# Altium PCB DSR_PCB_Altium.pcbdoc
Units mil, origin at the board's own origin, x right, y up, seen from the top; angles counter-clockwise.
Board outline 4240.23 x 3970 mil, 2 copper layers (Top Layer, Bottom Layer); 48 components, 77 nets, 203 pads, 37 vias.
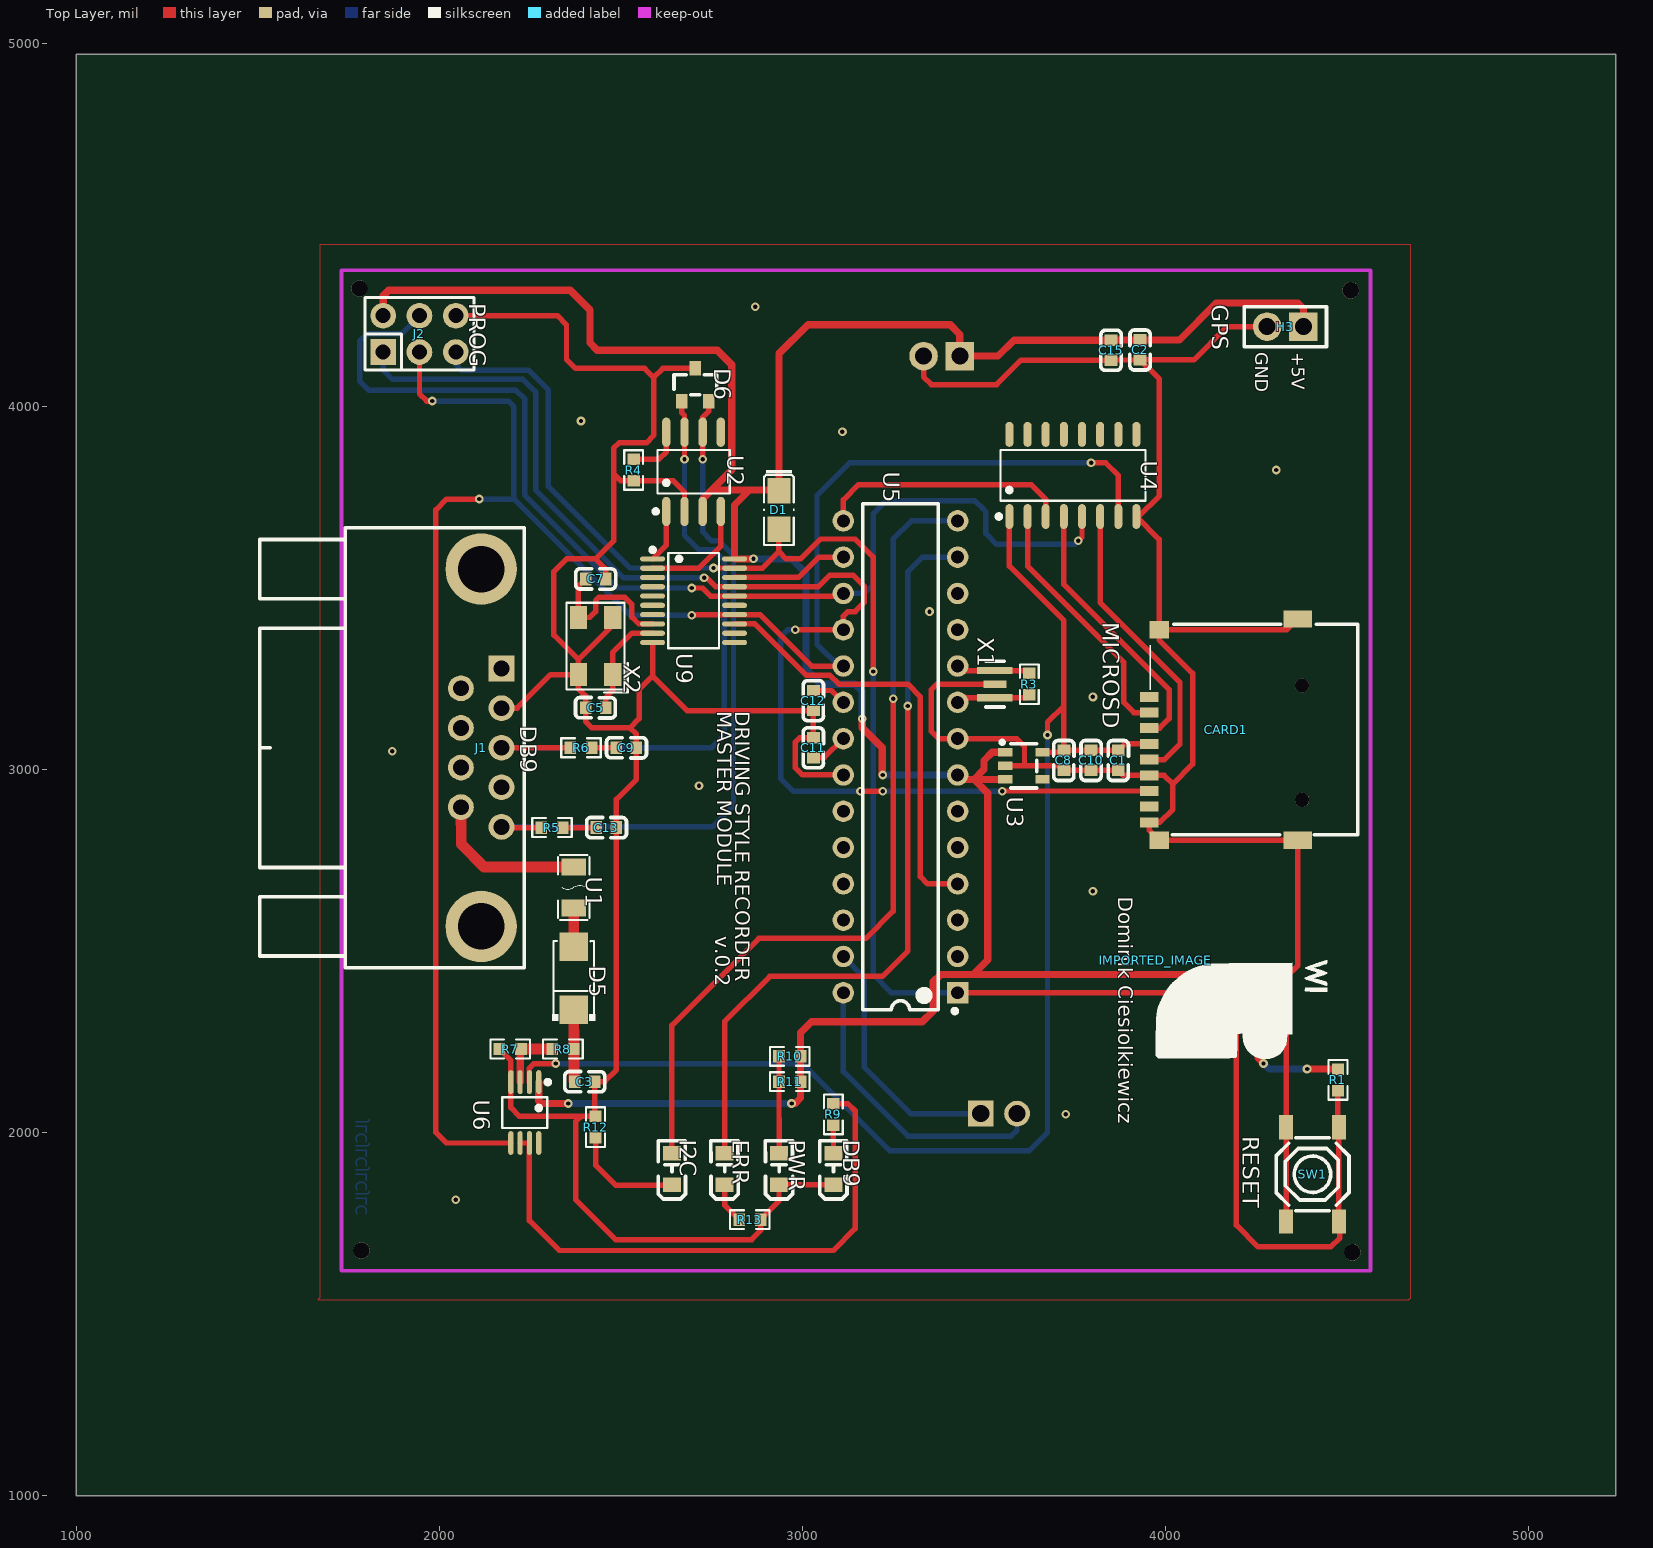
[diagram p0: Top Layer view]
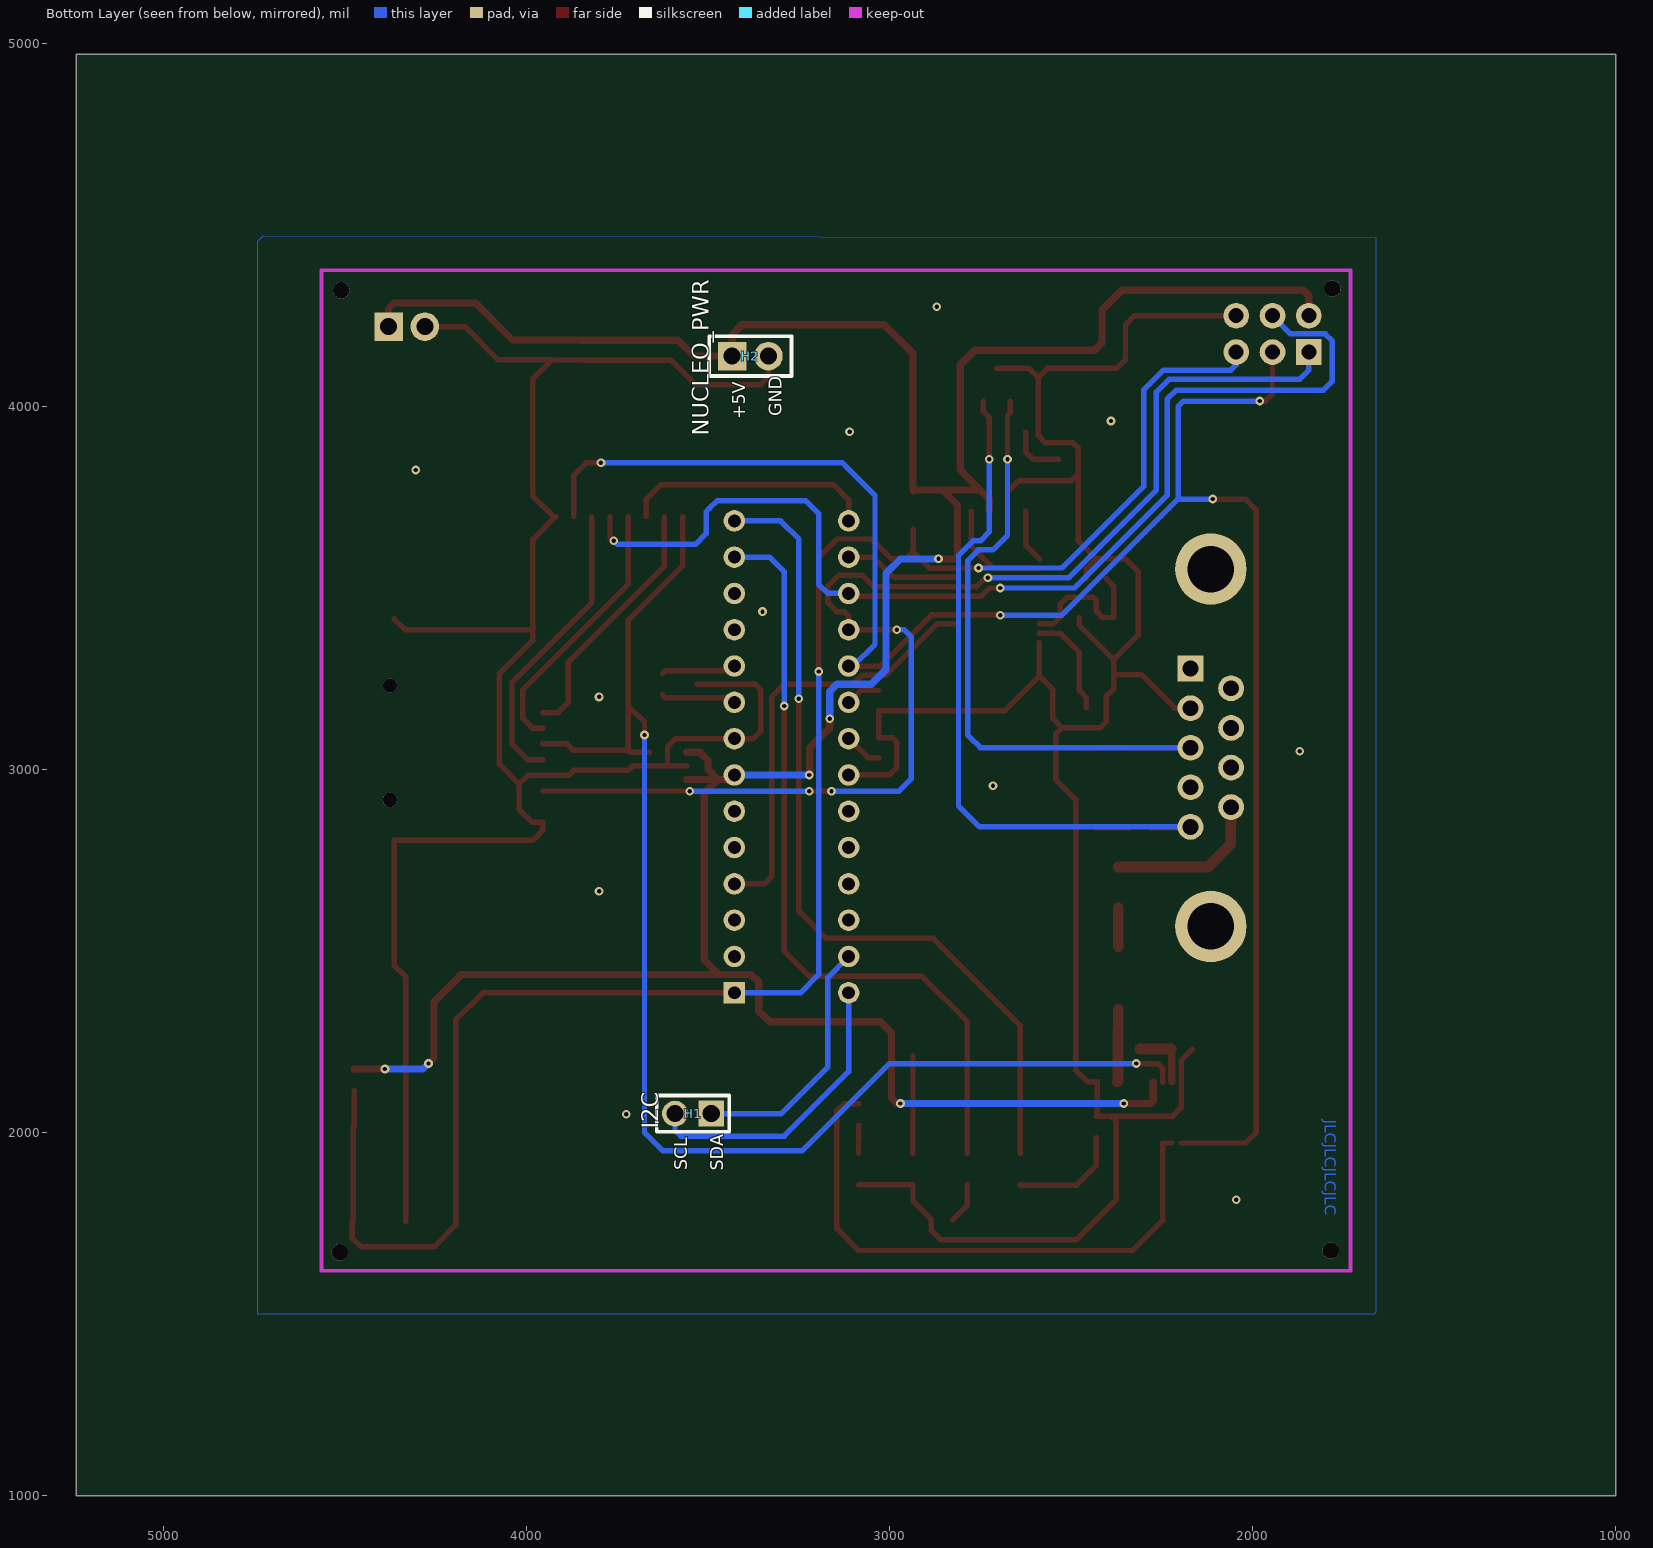
[diagram p1: Bottom Layer view, seen from below]

## Layer stack, top to bottom
Top Layer: signal copper (thickness not stored)
Dielectric: dielectric 12.6, FR-4, Dk 4.8
Bottom Layer: signal copper (thickness not stored)

## Board outline
5240.23,1000 1000,1000 1000,4970 5240.23,4970

## Components (designator, comment, footprint, x,y, rotation, side; value= is the part's Value field where it differs from the comment)
C1 "1uF" C0603 3870.24,3025 r90 top
C2 "100nF" C0603 3930.24,4155.8 r90 top
C3 "4.7uF" C0603 2400.24,2140 r180 top
C5 "22pF" C0603 2430.24,3170 r0 top
C7 "22pF" C0603 2430.24,3525 r180 top
C8 "100nF" C0603 3720.24,3025 r90 top
C9 "560pF" C0603 2515.24,3060 r180 top
C10 "1uF" C0603 3795.24,3025 r90 top
C11 "100nF" C0603 3030.24,3060 r90 top
C12 "100nF" C0603 3030.24,3190 r90 top
C13 "560pF" C0603 2460.24,2840 r180 top
C15 "100nF" C0603 3850.24,4155 r90 top
CARD1 "TF-01A" TF-SMD_TF-01A 4160.23,3110 r90 top
D1 "CD1206-S01575" D1206-RD 2935.24,3715 r270 top
D5 "MBRA140T3G" SMA_L4.3-W2.6-LS5.2-RD 2370.24,2425 r90 top
D6 "PESD1CAN,215" SOT-23_L2.9-W1.3-P1.90-LS2.4-BR 2705.24,4060 r270 top
DB9 "17-21SUYC/TR8" LED0805-RD 3085.63,1899.72 r90 top
ERR "0805G (Green)" LED0805-RD_GREEN 2785.63,1899.72 r90 top
H1 "210S-1*2P L=11.6MMGold-plated black" HDR-TH_2P-P2.54-V-M-1 3541.26,2052.16 r180 bottom
H2 "22850102ANG1SYA02" HDR-TH_2P-P2.54-V-F#1 3383.78,4138.78 r0 bottom
H3 "22850102ANG1SYA02" HDR-TH_2P-P2.54-V-F#2 4330.23,4220 r180 top
I2C "0805G (Green)" LED0805-RD_GREEN 2640.63,1899.72 r90 top
IMPORTED_IMAGE "IMPORTED_IMAGE" IMPORTED_IMAGE 3972.94,2475 r0 top
J1 "DS1037-09MNAKT74-0CC" DB9-TH_DT10121-M5N3-4F 2115.24,3060 r270 top
J2 "Header-Male-2.54_2x3" HDR-TH_6P-P2.54-V-M-R2-C3-S2.54-1 1945.23,4200 r0 top
PWR "0805G (Green)" LED0805-RD_GREEN 2935.63,1899.72 r90 top
R1 "10K" R0603 4475.23,2145 r90 top
R3 "1M" R0603 3625.24,3235 r270 top
R4 "4.7K" R0603 2535.24,3825 r270 top
R5 "100" R0603 2310.24,2840 r180 top
R6 "100" R0603 2390.24,3060 r180 top
R7 "10K" R0603 2195.24,2230 r0 top
R8 "10K" R0603 2340.24,2230 r0 top
R9 "1K" R0603 3085.24,2050 r90 top
R10 "1K" R0603 2965.24,2210 r0 top
R11 "1K" R0603 2965.24,2140 r0 top
R12 "1K" R0603 2430.24,2015 r90 top
R13 "1K" R0603 2855.24,1760 r0 top
SW1 "TS-1187A-B-A-B" SW-SMD_4P-L5.1-W5.1-P3.70-LS6.5-TL-2 4405.23,1885 r270 top
U1 "1206L035YR" F1206 2370.24,2675 r270 top
U2 "MCP2551-I/SN" SOIC-8_L4.9-W3.9-P1.27-LS6.0-BL 2700.24,3820 r0 top
U3 "LP2985-33DBVR" SOT-23-5_L2.9-W1.6-P0.95-LS2.8-TL 3610.24,3010 r180 top
U4 "74HC4050D,653" SOP-16_L10.0-W3.9-P1.27-LS6.0-BL 3745.24,3810 r0 top
U5 "ATMEGA328P-PU" DIP-28_L34.6-W7.3-P2.54-LS10.2-BL 3270.24,3035 r90 top
U6 "LMV358IDGKR" VSSOP-8_L3.0-W3.0-P0.65-LS5.0-BL 2235.24,2055 r180 top
U9 "MCP2515-I/ST" TSSOP-20_L6.5-W4.4-P0.65-LS6.4-BL 2700.24,3465 r270 top
X1 "16MHz" OSC-SMD_3P-L3.2-W1.3-P0.95-L 3530.24,3235 r270 top
X2 "16MHz" CRYSTAL-SMD_4P-L5.0-W3.2-BL 2430.24,3340 r90 top

## Footprints (in the part's own frame and the unit in brackets; to place one, negate y for a bottom-side part, rotate by r counter-clockwise, add the part's x,y. Pads: shape width x height; smd on the part's side, far side on the other; paste and mask are expansions set on the pad)
C0603 [mm]
  rect 0.8x0.9 smd: 1(-0.7,0) 2(0.7,0)
  silkscreen extent -1.41,-0.71 1.39,0.72
CRYSTAL-SMD_4P-L5.0-W3.2-BL [mm]
  rect 1.6x1.2 smd: 1(-2,-1.2) 2(2,-1.2) 3(2,1.2) 4(-2,1.2)
  silkscreen extent -3.26,-2.26 3.03,2.03
D1206-RD [mm]
  rect 1.785x1.62 smd: 1(-1.343,0) 2(1.342,0)
  silkscreen extent -2.77,-1.08 2.46,1.08
DB9-TH_DT10121-M5N3-4F [mm]
  rect 1.8x1.8 hole 1.1: 1(-5.54,1.42)
  round 1.8 hole 1.1: 2(-2.77,1.42) 3(0,1.42) 4(2.77,1.42) 5(5.54,1.42) 6(-4.155,-1.42) 7(-1.385,-1.42) 8(1.385,-1.42) 9(4.155,-1.42)
  round 5 hole 3.25: 10(-12.5,0) 11(12.5,0)
  silkscreen extent -15.4,-15.5 15.4,3
DIP-28_L34.6-W7.3-P2.54-LS10.2-BL [mm]
  rect 1.5x1.5 hole 0.9: 1(-16.51,-4)
  round 1.5 hole 0.9: 2(-13.97,-4) 3(-11.43,-4) 4(-8.89,-4) 5(-6.35,-4) 6(-3.81,-4) 7(-1.27,-4) 8(1.27,-4) 9(3.81,-4) 10(6.35,-4) 11(8.89,-4) 12(11.43,-4) 13(13.97,-4) 14(16.51,-4) 15(16.51,4) 16(13.97,4) 17(11.43,4) 18(8.89,4) 19(6.35,4) 20(3.81,4) 21(1.27,4) 22(-1.27,4) 23(-3.81,4) 24(-6.35,4) 25(-8.89,4) 26(-11.43,4) 27(-13.97,4) 28(-16.51,4)
  silkscreen extent -17.94,-3.95 17.7,2.65
F1206 [mil]
  rect 46.85x68.03 smd: 1(-56.89,0) 2(56.89,0)
  silkscreen extent -89,-43 89,43
HDR-TH_2P-P2.54-V-F#1 [mm]
  rect 2x2 hole 1.2: 1(1.27,0)
  round 2 hole 1.2: 2(-1.27,0)
  silkscreen extent -2.88,-1.4 2.88,1.39
HDR-TH_2P-P2.54-V-F#2 [mm]
  rect 2x2 hole 1.2: 1(-1.27,0)
  round 2 hole 1.2: 2(1.27,0)
  silkscreen extent -2.88,-1.39 2.88,1.4
HDR-TH_2P-P2.54-V-M-1 [mm]
  rect 1.8x1.8 hole 1.2: 1(1.27,0)
  round 1.8 hole 1.2: 2(-1.27,0)
  silkscreen extent -2.54,-1.27 2.54,1.27
HDR-TH_6P-P2.54-V-M-R2-C3-S2.54-1 [mm]
  rect 1.8x1.8 hole 1.05: 1(-2.54,-1.27)
  round 1.8 hole 1.05: 2(-2.54,1.27) 3(0,-1.27) 4(0,1.27) 5(2.54,-1.27) 6(2.54,1.27)
  silkscreen extent -3.81,-2.54 3.81,2.54
IMPORTED_IMAGE [mil]
  silkscreen extent 0,-272 473,0
LED0805-RD [mm]
  rect 1x1.25 smd: 1(-1.1,0) 2(1.1,0)
  silkscreen extent -2.1,-0.95 1.98,0.96
LED0805-RD_GREEN [mm]
  rect 1x1.25 smd: 1(-1.1,0) 2(1.1,0)
  silkscreen extent -2.1,-0.95 1.98,0.96
OSC-SMD_3P-L3.2-W1.3-P0.95-L [mm]
  rect 0.5x2.5 smd: 1(-0.95,0) 3(0.95,0)
  rect 0.5x1.6 smd: 2(0,0)
  silkscreen extent -1.6,-0.65 1.6,0.65
R0603 [mil]
  rect 31.75x34.02 smd: 1(-29.66,0) 2(29.66,0)
  silkscreen extent -55,-26 55,26
SMA_L4.3-W2.6-LS5.2-RD [mm]
  rect 2x2 smd: 1(-2.2,0) 2(2.2,0)
  silkscreen extent -2.98,-1.5 2.6,1.5
SOIC-8_L4.9-W3.9-P1.27-LS6.0-BL [mm]
  oval 0.588x2.045 smd: 1(-1.905,-2.773) 2(-0.635,-2.773) 3(0.635,-2.773) 4(1.905,-2.773) 5(1.905,2.773) 6(0.635,2.773) 7(-0.635,2.773) 8(-1.905,2.773)
  silkscreen extent -2.8,-2.92 2.53,1.52
SOP-16_L10.0-W3.9-P1.27-LS6.0-BL [mm]
  oval 0.56x1.745 smd: 1(-4.445,-2.873) 2(-3.175,-2.873) 3(-1.905,-2.873) 4(-0.635,-2.873) 5(0.635,-2.873) 6(1.905,-2.873) 7(3.175,-2.873) 8(4.445,-2.873) 9(4.445,2.873) 10(3.175,2.873) 11(1.905,2.873) 12(0.635,2.873) 13(-0.635,2.873) 14(-1.905,2.873) 15(-3.175,2.873) 16(-4.445,2.873)
  silkscreen extent -5.33,-3.02 5.08,1.77
SOT-23-5_L2.9-W1.6-P0.95-LS2.8-TL [mm]
  rect 1x0.6 smd: 1(1.3,-0.95) 2(1.3,0) 3(1.3,0.95) 4(-1.3,0.95) 5(-1.3,-0.95)
  silkscreen extent -0.9,-1.78 1.65,1.55
SOT-23_L2.9-W1.3-P1.90-LS2.4-BR [mm]
  rect 1x0.8 smd: 1(1.15,-0.95) 2(1.15,0.95) 3(-1.15,0)
  silkscreen extent -0.7,-1.5 0.7,1.5
SW-SMD_4P-L5.1-W5.1-P3.70-LS6.5-TL-2 [mm]
  rect 1.7x1 smd: 1(-3.3,1.849) 2(3.3,1.85) 3(-3.3,-1.85) 4(3.3,-1.85)
  silkscreen extent -2.55,-2.55 2.55,2.55
TF-SMD_TF-01A [mm]
  rect 0.7x1.3 smd: 1(2.292,5.2) 2(1.192,5.198) 3(0.096,5.2) 4(-1.004,5.2) 5(-2.103,5.2) 6(-3.201,5.2) 7(-4.297,5.2) 8(-5.395,5.2) 9(-6.499,5.2)
  rect 1.2x1.397 smd: 10(-7.747,4.502) 13(6.985,4.502)
  rect 1.2x2 smd: 11(-7.747,-5.2) 12(7.747,-5.2)
  round 1 hole 1 unplated: ""(-4.915,-5.49) ""(3.084,-5.487)
  silkscreen extent -7.37,-9.4 7.37,5.14
TSSOP-20_L6.5-W4.4-P0.65-LS6.4-BL [mm]
  oval 0.364x1.742 smd: 1(-2.925,-2.871) 2(-2.275,-2.871) 3(-1.625,-2.871) 4(-0.975,-2.871) 5(-0.325,-2.871) 6(0.325,-2.871) 7(0.975,-2.871) 8(1.625,-2.871) 9(2.275,-2.871) 10(2.925,-2.871) 11(2.925,2.871) 12(2.275,2.871) 13(1.625,2.871) 14(0.975,2.871) 15(0.325,2.871) 16(-0.325,2.871) 17(-0.975,2.871) 18(-1.625,2.871) 19(-2.275,2.871) 20(-2.925,2.871)
  silkscreen extent -3.71,-3.02 3.33,1.77
VSSOP-8_L3.0-W3.0-P0.65-LS5.0-BL [mm]
  oval 0.364x1.662 smd: 1(-0.975,-2.131) 2(-0.325,-2.131) 3(0.325,-2.131) 4(0.975,-2.131) 5(0.975,2.131) 6(0.325,2.131) 7(-0.325,2.131) 8(-0.975,2.131)
  silkscreen extent -1.76,-2.28 1.58,1.07

## Free pads (board coordinates)
  round 45.35 hole 45.35 unplated: 2(1780.23,4325) 2(1785.23,1675) 2(4510.23,4320) 2(4515.23,1670)

## Via types
v1: diameter 24, hole 12, Top Layer to Bottom Layer, 37 vias

## Nets (pads, with @x,y where several pads share a name; then routed paths per layer and width w, separated by ;. In a path a pad name is that pad's centre, name@x,y a point inside that pad or via, vN(x,y) a via of type N, cw(c..) or ccw(c..) an arc to the next point about the centre after c; other vN are vias at no path point)
+3.3V: C1.2 C8.2 C10.2 CARD1.4 U3.5 U4.1 U6.2 | length 3795.6
  Top Layer w15: U6.2 2248.03,2177.79 2260.24,2190 v1(2320.24,2190) ; U4.1 3570.24,3560 3720.24,3410 C8.2 ; U3.5 3715.07,3047.4 C8.2 ; v1(3675.24,3095) 3675.24,3130.53 3720.24,3175.53 ; CARD1.4 3888.16,3070.48 C1.2 C10.2 C8.2
  Bottom Layer w15: v1(2320.24,2190) 3000.24,2190 3240.24,1950 3625.24,1950 3675.24,2000 v1(3675.24,3095)
+5V: C2.2 C15.2 D1.1 H2.1 H3.1 J2.2 R1.2 R10.2 R11.2 U2.3 U3.1 U3.3 U5.7 U6.1 U9.20 | length 8743.8
  Top Layer w20: J2.2 1845.23,4305 1860.23,4320 2360.24,4320 2415.24,4265 2415.24,4175 2435.24,4155 2765.24,4155 2805.24,4115 2805.24,3825 2750.24,3770 ; U6.1 2273.62,2086.61 2280.24,2080 v1(2355.24,2080) ; U2.3 2725.24,3745 2750.24,3770 ; 2854.45,3770 2813.26,3728.82 U9.20 v1(2865.24,3580.16) ; D1.1 2933.09,3770 2750.24,3770 ; D1.1 2935.24,4145 3015.24,4225 3407.34,4225 3433.74,4198.5 H2.1@3433.74,4138.8 ; v1(2970.24,2080) 2980.24,2080 2994.93,2095.3 R11.2 ; R11.2 R10.2 2994.89,2274.66 3025.24,2305 3330.24,2305 3360.24,2335 3360.24,2415 3380.24,2435 3470.24,2435 ; v1(3165.24,3140) 3165.24,3115 3220.24,3060 3220.24,2990 v1@3220.24,2985 ; U5.7 3440.11,2972.6 U3.3@3559.05,2972.6 ; H2.1 3539.01,4138.78 3582.8,4182.56 C15.2 ; U3.1@3559.03,3047.4 3522.64,3047.4 3500.24,3025 3500.24,3000.4 3472.43,2972.6 3510.24,2934.8 3510.24,2475 3470.24,2435 ; C15.2 C2.2 ; C2.2 4038.59,4183.36 4140.23,4285 4365.23,4285 4380.23,4270 H3.1 ; v1(4270.23,2190) 4255.23,2205 4255.23,2360 4180.23,2435 3470.24,2435 ; v1(4390.23,2175) 4474.9,2175 R1.2 ; v1@3220.24,2985 v1(3221.24,2985) v1@3220.24,2985
  Bottom Layer w20: v1(2355.24,2080) v1(2970.24,2080) ; v1(2865.24,3580.16) 2970.07,3580.16 3010.24,3540 3010.24,3275 3050.24,3235 3145.24,3235 3165.24,3215 v1(3165.24,3140) ; v1(3221.24,2985) U5.7 ; v1(4270.23,2190) 4285.23,2175 v1(4390.23,2175)
+12V: C3.2 D5.1 R8.2 | length 199.3
  Top Layer w30: D5.1 R8.2@2370.53,2230 ; R8.2@2370.57,2230 2370.57,2142.1 C3.2
C11_1: C11.1 U5.21 | length 104.3
  Top Layer w15: C11.1 3060.2,3032.44 U5.21
C12_2: C12.2 U5.20 | length 96
  Top Layer w15: C12.2 3080.2,3217.56 U5.20
CAN_INT: U5.4 U9.13 | length 1201
  Top Layer w15: U9.13@2813.24,3401 2869.24,3401 3010.24,3260 3075.24,3260 3100.24,3235 3290.24,3235 3325.24,3200 3325.24,2705 3345.24,2685 U5.4
CAN_RXD: U2.4 U9.2 | length 308.9
  Top Layer w15: U9.2 2714.8,3554.57 2775.24,3615 U2.4
CAN_TXD: U2.1 U9.1 | length 146.4
  Top Layer w15: U9.1 2625.24,3618.19 U2.1
CARD1_1: CARD1.1
CARD1_2: CARD1.2 U4.2 | length 703.7
  Top Layer w15: U4.2 3620.24,3560 3885.24,3295 3885.24,3185 3913.3,3156.93 CARD1.2
CARD1_3: CARD1.3 U4.4 | length 742.6
  Top Layer w15: U4.4 3720.24,3510 4010.24,3220 4010.24,3140 3983.99,3113.76 CARD1.3
CARD1_5: CARD1.5 U4.6 | length 820.5
  Top Layer w15: U4.6 3820.24,3460 4040.24,3240 4040.24,3070 3997.43,3027.2 CARD1.5
CARD1_8: CARD1.8
D7: ERR.2 U5.13 | length 2146.6
  Top Layer w15: ERR.2 2785.62,2305.39 2910.24,2430 3220.24,2430 3290.24,2500 v1(3290.24,3175)
  Bottom Layer w15: v1(3290.24,3175) 3290.24,3545 3330.24,3585 U5.13
D8: I2C.2 U5.14 | length 2315.5
  Top Layer w15: I2C.2 2640.62,2295.39 2880.24,2535 3175.24,2535 3250.24,2610 3250.24,3170 v1(3250.24,3195)
  Bottom Layer w15: v1(3250.24,3195) 3250.24,3635 3300.24,3685 U5.14
D9: U4.3 U5.15 | length 697.3
  Top Layer w15: U5.15@3112.74,3685 3112.74,3742.5 3155.24,3785 3630.24,3785 3670.24,3745 U4.3
D10: U5.16 U9.18 | length 322.7
  Top Layer w15: U9.18 2989.22,3528.98 3045.24,3585 U5.16
D11/MOSI: J2.4 U4.5 U5.17 U9.16 | length 3067.4
  Top Layer w15: v1(2695.24,3500) 2725.24,3500 2747.45,3477.79 U9.16 3105.55,3477.79 U5.17 ; v1(3760.24,3630) 3770.24,3640 U4.5
  Bottom Layer w15: J2.4 1895.23,4200 1800.23,4200 1780.23,4180 1780.23,4070 1805.23,4045 2210.24,4045 2235.24,4020 2235.24,3755 2490.24,3500 v1(2695.24,3500) ; U5.17@3112.74,3485 3170.24,3485 3195.24,3510 3195.24,3705 3230.24,3740 3475.24,3740 3495.53,3719.7 3505.24,3710 3505.24,3650 3535.24,3620 3750.24,3620 v1(3760.24,3630)
D12/MISO: CARD1.7 J2.1 U5.18 U9.17 | length 3562
  Top Layer w15: v1(2729.24,3528) 2737.24,3528 2761.85,3503.39 U9.17 3043.64,3503.4 3075.24,3535 3140.24,3535 3170.24,3505 3170.24,3460 3145.24,3435 3125.24,3435 3112.76,3422.52 U5.18 v1(2980.24,3385) ; v1(3160.24,2940) v1(3221.24,2940) ; v1(3550.24,2940) CARD1.7
  Bottom Layer w15: J2.1 1845.23,4100 1870.23,4075 2230.24,4075 2265.24,4040 2265.24,3770 2507.24,3528 v1(2729.24,3528) ; v1(2980.24,3385) 2960.24,3385 2940.24,3365 2940.24,2975 2975.24,2940 v1(3160.24,2940) ; v1(3221.24,2940) v1(3550.24,2940)
GND: C1.1 C2.1 C3.1 C5.1 C7.1 C8.1 C9.1 C10.1 C11.2 C12.1 C13.1 C15.1 CARD1.6 CARD1.9 CARD1.10 CARD1.11 CARD1.12 CARD1.13 D6.3 DB9.1 H2.2 H3.2 J1.2 J2.6 pad.2 PWR.1 R4.2 R7.1 R12.2 R13.2 SW1.3 SW1.4 U2.2 U3.2 U4.8 U5.8 U5.22 U6.4 U9.10 X1.2 X2.2 X2.4 | length 12139.5
  Top Layer w15: J2.6 2325.24,4250 2350.24,4225 2350.24,4130 2375.24,4105 2565.24,4105 2590.24,4080 ; R7.1 2196.84,2198.73 U6.4 2196.84,2068.4 2220.53,2044.7 2389.93,2044.7 ; J1.2 2214.28,3169.05 2306.49,3261.26 X2.4 ; 2383.03,3302.8 2315.24,3370 2315.24,3545 2350.24,3580 2430.24,3580 ; R12.2 2427.8,2047.1 C3.1 2455.24,2140 2487.8,2172.56 C13.1 2487.8,2917.56 2542.8,2972.56 C9.1 2542.8,3097.44 2525.24,3115 ; R12.2 2389.93,2044.7 ; C7.1 2457.84,3552.4 2430.24,3580 ; X2.2 2477.47,3397.24 2382.99,3302.76 X2.4 ; U9.10 2587.2,3257.91 2682.67,3162.44 C12.1 C11.2 ; 2587.24,3257.9 2550.24,3220 2550.24,3140 2525.24,3115 ; U2.2 2675.24,3765 2644.89,3795.34 R4.2 2499.89,3795.34 2480.24,3815 ; D6.3 2615.51,4105.28 2590.24,4080 ; R13.2 2935.62,1810.73 PWR.1 DB9.1 ; R13.2 2884.93,1730.3 2860.24,1705 2485.24,1705 2375.24,1815 2375.24,2030 2389.93,2044.7 ; C11.2 2992.84,3087.6 2980.24,3075 2980.24,3005 3000.24,2985 U5.22@3112.74,2985 ; H2.2 3333.78,4081.46 3355.24,4060 3535.24,4060 3602.68,4127.44 C15.1 ; X1.2 3370.24,3235 3355.24,3220 3355.24,3105 3375.24,3085 U5.8 3590.24,3085 3611.76,3063.47 3611.76,3010 ; U3.2@3559.05,3010 3707.68,3010 C8.1 C10.1 C1.1 3883.7,2983.98 CARD1.6 3996.26,2983.98 4020.24,2960 ; C15.1 C2.1 ; H3.2 4170.23,4220 4078.47,4128.24 C2.1 3983.24,4075.24 3983.24,3754 3926.14,3696.91 U4.8 3983.01,3634.14 CARD1.13 ; SW1.4 SW1.3 4332.39,2427.75 4364.94,2460.3 4364.94,2805 CARD1.10 3955.51,2832.49 CARD1.9 3984.36,2854.12 4020.24,2890 4020.24,2960 ; CARD1.12 4334.96,3385 CARD1.13 ; X2.4 2382.99,3222.24 2402.68,3202.56 C5.1 2402.68,3132.56 2420.24,3115 2525.24,3115 ; 2430.24,3580 2480.24,3630 2480.24,3815 ; 2480.24,3815 2480.24,3885 2495.24,3900 2570.24,3900 2590.24,3920 2590.24,4080 ; CARD1.13 3983.01,3357.23 4075.24,3265 4075.24,3015 4020.24,2960
  other v1: 2045.23,1815 3725.24,2050 3800.24,2665 2715.24,2955 1870.23,3050 3800.24,3200 3350.24,3435 4305.23,3825 3110.24,3930 2390.24,3960 2870.24,4275
J1_1: J1.1
J1_4: J1.4
J1_6: J1.6
J1_7: J1.7
J1_8: J1.8
J1_9: J1.9 U1.1 | length 437.5
  Top Layer w30: J1.9 2060.24,2795 2123.34,2731.9 U1.1
J1_10: J1.10
J1_11: J1.11
R3_1: R3.1 U5.10 X1.1 | length 205.9
  Top Layer w15: U5.10 3440.32,3272.4 X1.1 3617.49,3272.4 R3.1
R3_2: R3.2 U5.9 X1.3 | length 205.9
  Top Layer w15: U5.9 3440.32,3197.6 X1.3 3617.49,3197.6 R3.2
R5_1: C13.2 R5.1 | length 92.8
  Top Layer w15: R5.1 C13.2
R6_1: C9.2 R6.1 | length 67.8
  Top Layer w15: R6.1 C9.2
R7_2: R7.2 R8.1 U6.3 | length 177.8
  Top Layer w20: U6.3 2222.43,2227.54 R7.2
  Top Layer w30: R7.2 R8.1
R9_1: DB9.2 R9.1 | length 77.3
  Top Layer w15: R9.1 DB9.2
R10_1: PWR.2 R10.1 R11.1 | length 267
  Top Layer w15: R11.1@2935.53,2140 PWR.2 ; R11.1 R10.1
R12_1: I2C.1 R12.1 | length 309.1
  Top Layer w15: R12.1 2430.24,1910 2485.24,1855 2639.21,1855 I2C.1
R13_1: ERR.1 R13.1 | length 113
  Top Layer w15: ERR.1 2785.62,1799.95 R13.1
RS: D1.2 J2.5 R1.1 SW1.1 SW1.2 U5.1 U9.19 | length 5199.2
  Top Layer w15: v1(2755.24,3555) U9.19@2813.24,3554.6 ; U9.19 2889.8,3554.57 2935.24,3600 ; D1.2@2935.24,3662.14 2935.24,3600 ; v1(3195.24,3270) 3195.24,3465 3195.24,3585 3190.24,3590 3145.24,3635 3125.24,3635 3050.24,3635 2995.24,3580 2955.24,3580 2935.24,3600 ; U5.1 4120.23,2385 4195.23,2310 4195.23,1745 4255.23,1685 4455.23,1685 4480.23,1710 4480.23,1752.93 SW1.2 ; R1.1 4475.23,2017.72 SW1.1 SW1.2@4478.03,1755.1
  Bottom Layer w15: J2.5 2045.23,4115 2060.24,4100 2245.24,4100 2300.24,4045 2300.24,3780 2525.24,3555 v1(2755.24,3555) ; v1(3195.24,3270) 3195.24,2435 3245.24,2385 U5.1
SCK: J2.3 U4.7 U5.19 U6.5 U9.14 | length 5407.1
  Top Layer w15: J2.3 1945.23,4035 1965.23,4015 v1(1980.23,4015) ; v1(2110.24,3745) 2020.23,3745 1990.23,3715 1990.23,2000 2019.13,1971.1 U6.5 ; v1(2695.24,3425) 2696.84,3426.61 U9.14 2883.62,3426.61 3025.24,3285 U5.19 ; v1(3795.24,3845) 3835.24,3845 3870.24,3810 U4.7
  Bottom Layer w15: v1(1980.23,4015) 2190.24,4015 2205.24,4000 2205.24,3745 ; v1(2110.24,3745) 2205.24,3745 ; v1(2695.24,3425) 2525.24,3425 2205.24,3745 ; U5.19 3100.24,3285 3040.24,3345 3040.24,3755 3120.24,3835 3130.24,3845 v1(3795.24,3845)
U1_2: D5.2 U1.2 | length 106.5
  Top Layer w30: D5.2 U1.2
U2_5: U2.5
U2_6: D6.2 J1.5 R5.2 U2.6 | length 1942.2
  Top Layer w15: J1.5 2173.03,2840 R5.2 ; v1(2725.24,3855) U2.6 2725.24,3970 2742.64,3987.4 D6.2
  Bottom Layer w15: J1.5 2752.12,2841.89 2810.24,2900 2810.24,3590 2770.24,3630 2750.24,3630 2725.24,3655 v1(2725.24,3855)
U2_7: D6.1 J1.3 R6.2 U2.7 | length 1809.8
  Top Layer w15: J1.3 R6.2 ; D6.1 2667.84,3982.4 2675.24,3975 U2.7 v1(2675.24,3855)
  Bottom Layer w15: J1.3 2750.24,3060 2780.24,3090 2785.24,3095 2785.24,3575 2755.24,3605 2715.24,3605 2675.24,3645 v1(2675.24,3855)
U2_8: R4.1 U2.8 | length 152.6
  Top Layer w15: R4.1 2604.89,3854.66 2625.24,3875 U2.8
U3_4: U3.4
U4_9: U4.9
U4_10: U4.10
U4_11: U4.11
U4_12: U4.12
U4_13: U4.13
U4_14: U4.14
U4_15: U4.15
U4_16: U4.16
U5_2: U5.2
U5_3: U5.3
U5_5: U5.5
U5_6: U5.6
U5_11: U5.11
U5_12: U5.12
U5_23: U5.23
U5_24: U5.24
U5_25: U5.25
U5_26: U5.26
U5_27: H1.1 U5.27 | length 702.8
  Bottom Layer w15: U5.27@3112.74,2485 3170.24,2427.5 3170.24,2180 3298.07,2052.17 H1.1
U5_28: H1.2 U5.28 | length 822.4
  Bottom Layer w15: U5.28@3112.74,2385 3112.74,2167.5 3290.24,1990 3575.24,1990 3591.24,2006 H1.2@3591.24,2052.2
U6_6: R9.2 U6.6 U6.7 | length 1588.6
  Top Layer w15: U6.6 U6.7 ; U6.7 2248.03,1757.2 2330.24,1675 3085.24,1675 3145.24,1735 3145.24,2060 3124.93,2079.7 R9.2
U6_8: U6.8
U9_3: U9.3
U9_4: U9.4
U9_5: U9.5
U9_6: U9.6
U9_7: U9.7
U9_8: C7.2 U9.8 X2.3 | length 410.6
  Top Layer w15: C7.2 2382.99,3505.32 X2.3 2413.97,3418.74 2430.24,3435 2430.24,3465 2440.24,3475 2510.24,3475 2530.24,3455 2530.24,3420 2549.22,3401.02 U9.8
U9_9: C5.2 U9.9 X2.1 | length 292.2
  Top Layer w15: C5.2 2457.8,3197.56 2477.47,3217.24 X2.1 2477.47,3322.24 2530.66,3375.43 U9.9
U9_11: U9.11
U9_12: U9.12
U9_15: U9.15
pads on no net: CARD1.

## Polygon pours and split planes (outlines as drawn)
GND on Bottom Layer (solid): 1660.23,4465 1660.23,1505 1665.23,1500 4740.23,1500 4740.23,4455 4725.23,4470
GND on Top Layer (solid): 1670.23,4445 1670.23,1545 1665.23,1540 4670.23,1540 4675.23,1545 4675.23,4445

## Other copper
Bottom Layer:
  text "JLCJLCJLCJLC" at 1800.98,2035 h31.5 r90

## Silkscreen, mask and mechanical layers (free items; w line width, h text height)
Top Overlay:
  text "PROG" at 2082.74,4285 h45 r270
  text "GPS" at 4127.73,4280 h45 r270
  text "GND" at 4247.73,4150 h35 r270
  text "+5V" at 4347.73,4150 h35 r270
  text "MICROSD" at 3827.74,3405 h45 r270
  text "MASTER MODULE" at 2765.24,3160 h40 r270
  text "DRIVING STYLE RECORDER" at 2815.24,3160 h40 r270
  text "DB9" at 2222.74,3120 h45 r270
  text "Dominik Ciesiolkiewicz" at 3870.24,2650 h40 r270
  text "v.0.2" at 2760.24,2540 h40 r270
  text "RESET" at 4212.73,1990 h45 r270
Bottom Overlay:
  text "GND" at 3297.74,3973 h35 r270
  text "+5V" at 3397.74,3965 h35 r270
  text "NUCLEO_PWR" at 3497.74,3920 h45 r270
  text "I2C" at 3637.74,2010 h45 r270
  text "SCL" at 3557.74,1896 h35 r270
  text "SDA" at 3457.74,1895 h35 r270